# Altium PCB pcb.PCBDOC
Units mm, origin at the board's own origin, x right, y up, seen from the top; angles counter-clockwise.
Board outline 150 x 150 mm, 2 copper layers (Top Layer, Bottom Layer); 109 components, 66 nets, 410 pads, 3 vias.
Unrouted connection lines stored in the file: 233.
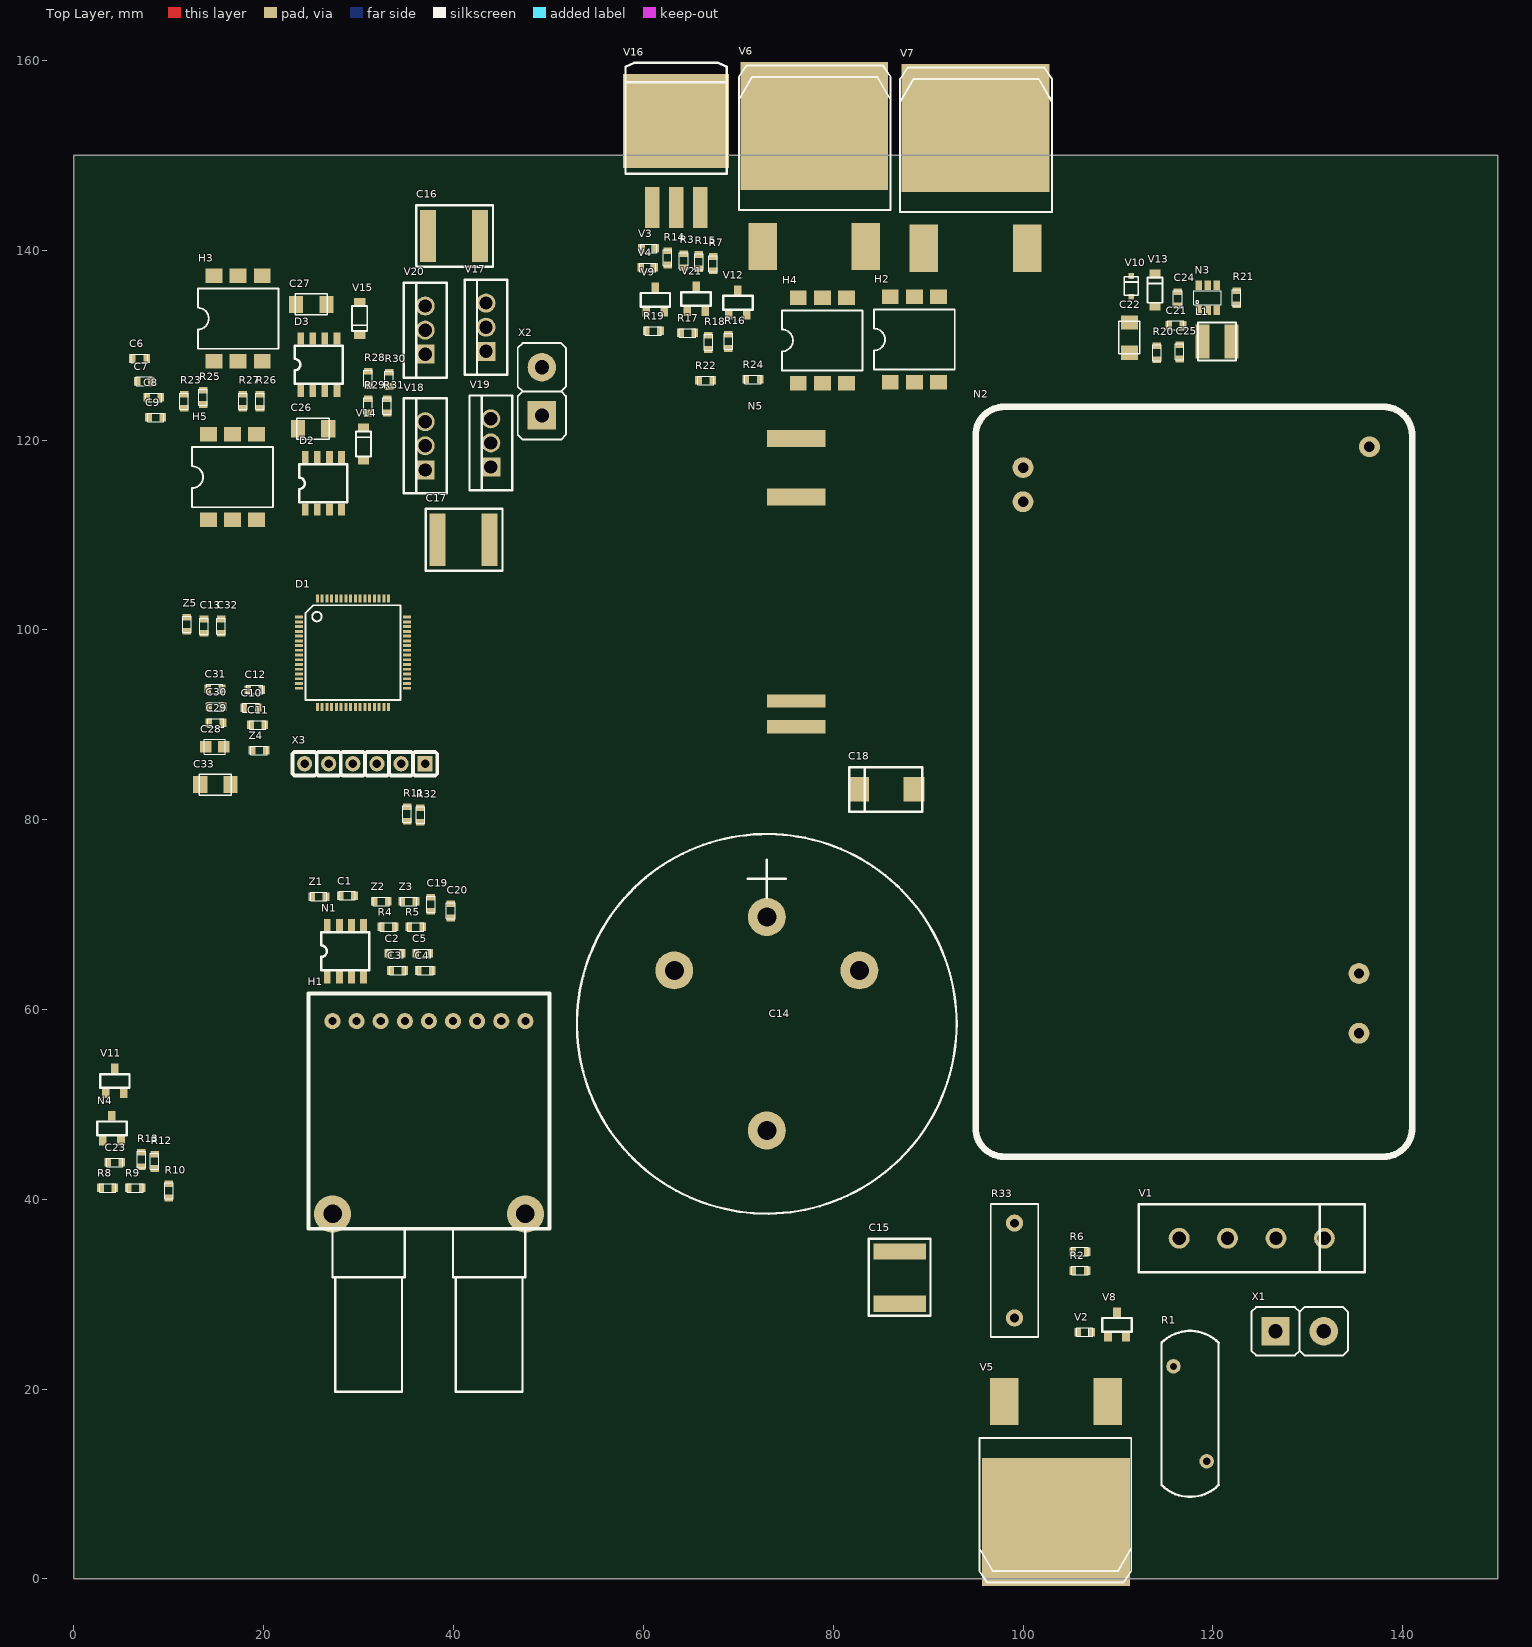
[diagram p0: Top Layer view]
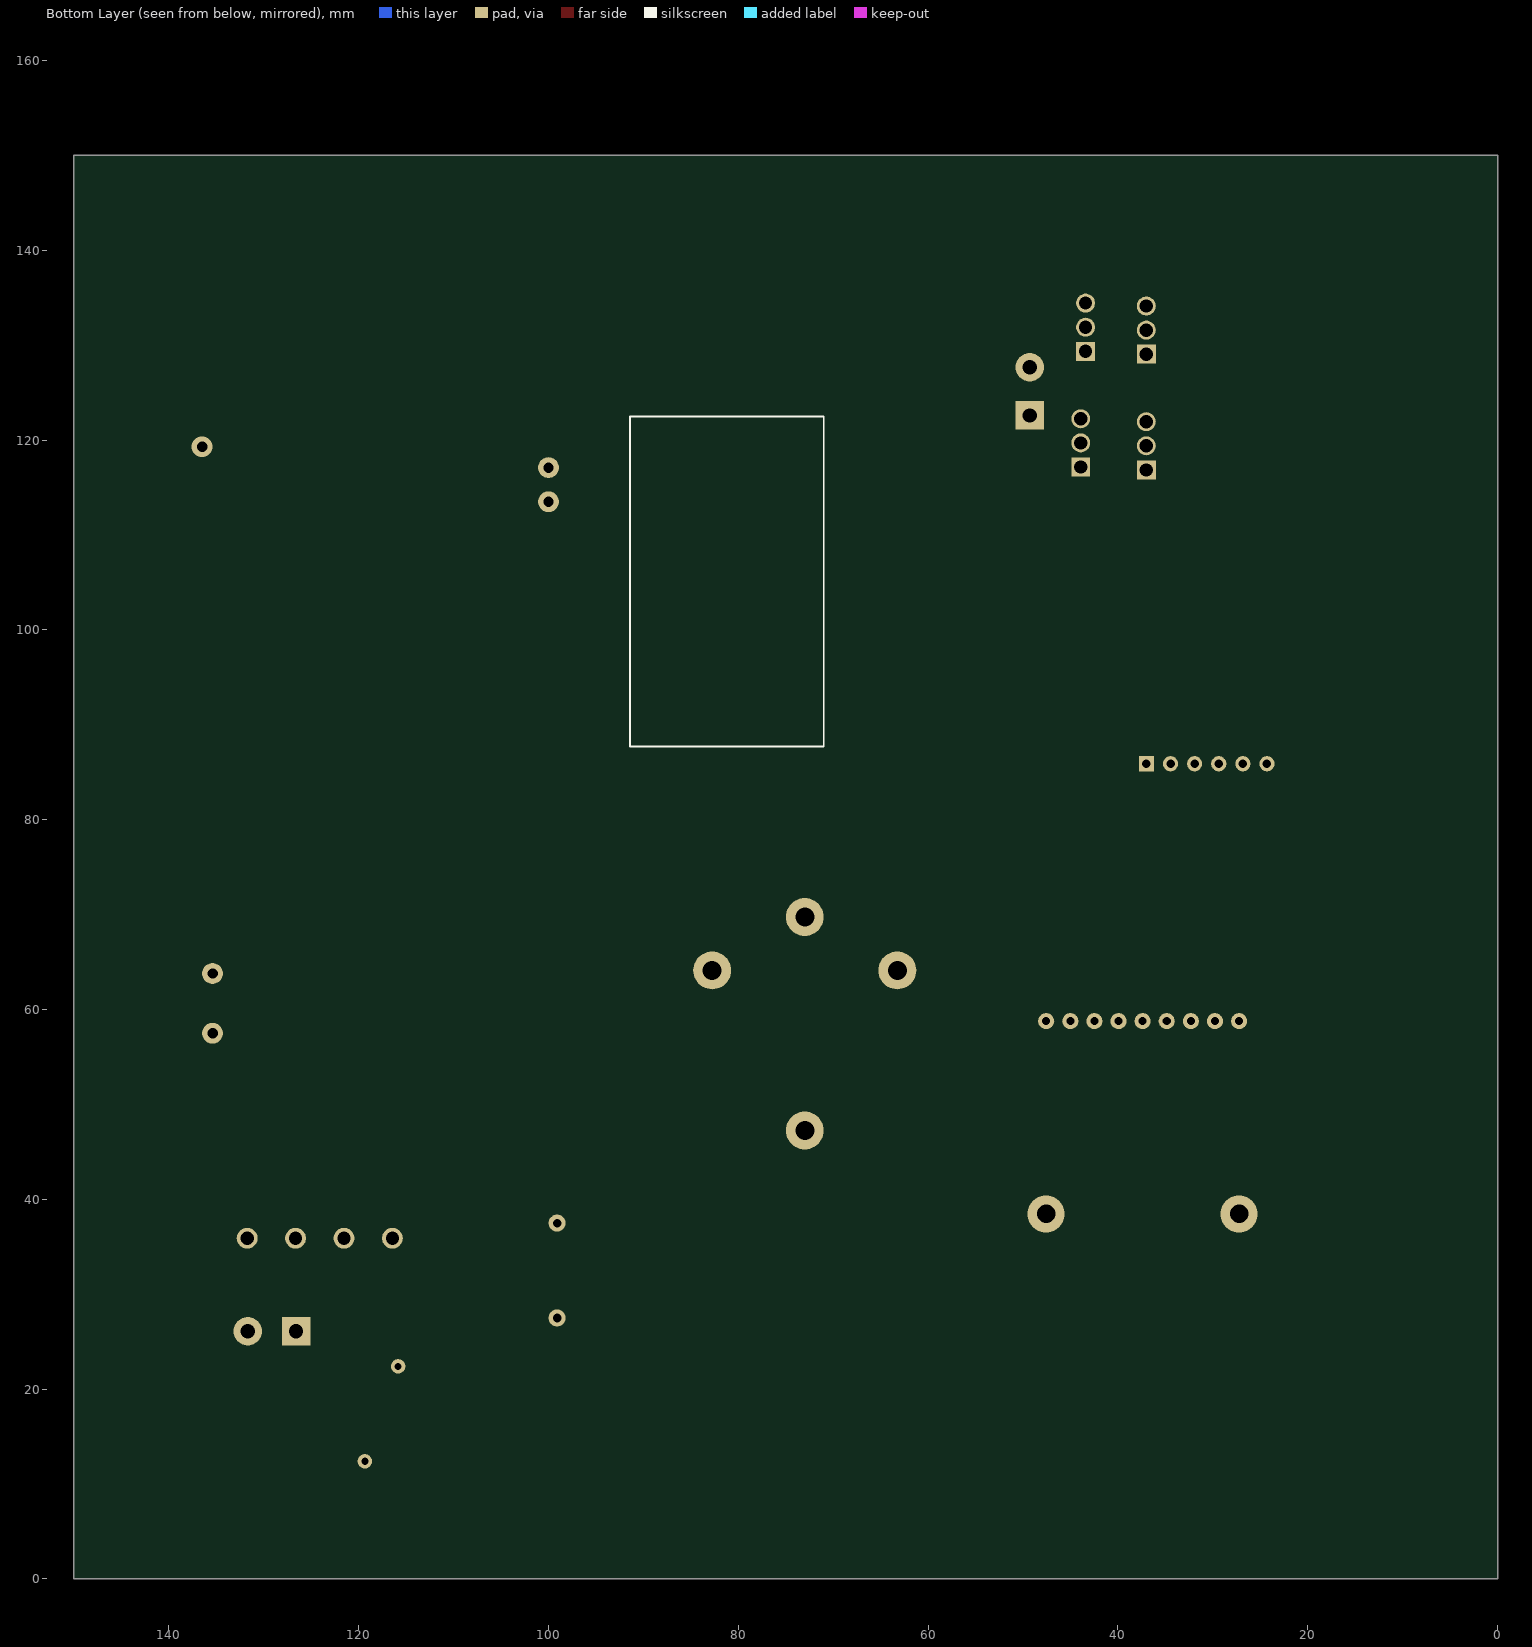
[diagram p1: Bottom Layer view, seen from below]

## Layer stack, top to bottom
Top Layer: signal copper 0.0356
Dielectric: dielectric 0.32, FR-4, Dk 4.8
Bottom Layer: signal copper 0.0356

## Board outline
0,0 150,0 150,150 0,150

## Design rules (kind name [scope] priority, off if disabled: settings)
Clearance [All] p1: gap=0.15
ComponentClearance [All] p1: gap=0.1 collisioncheckmode=2
Height [All] p1 off: minheight=0 maxheight=25.4 prefheight=12.7
PolygonConnect [All] p1: connectstyle=Relief reliefconductorwidth=0.254 reliefentries=4 polygonreliefangle="90 Angle"
RoomDefinition dclass-amp [InComponentClass('dclass-amp')] p1 off: confinementstyle=ConfineIn formatcopy=TRUE outline -188.468,-272.288 -137.668,-272.288 -137.668,-246.888 -188.468,-246.888
RoutingLayers [All] p1: top layer=Horizontal bottom layer=Vertical
RoutingVias [All] p1: holewidth=0.3 width=0.5 viastyle="Through Hole" minholewidth=0.3 minwidth=0.5 maxholewidth=0.3 maxwidth=0.5
SolderMaskExpansion [All] p1: expansion=0.102
TestPointUsage [All] p1: valid=0 allowmultiple=FALSE
Testpoint [All] p1: side=15 testpointundercomponent=TRUE minsize=1.016 maxsize=2.54 preferedsize=1.524 minholesize=0 maxholesize=1.016 preferedholesize=0.813 testpointgrid=0.025 style=1023 order=-539222988
Width [All] p1: maxlimit=1 minlimit=0.15 preferedwidth=0.15
15 further rules are at their usual default settings.

## Components (designator, comment, footprint, x,y, rotation, side; value= is the part's Value field where it differs from the comment)
C1 "C_SMD_CER_100N_50V_10%_X7R_0603" SMD_0603 28.8,72 r0 top
C2 "C_SMD_CER_100N_50V_10%_X7R_0603" SMD_0603 33.833,65.915 r0 top
C3 "C_SMD_CER_100N_50V_10%_X7R_0603" SMD_0603 34.1,64.115 r0 top
C4 "C_SMD_CER_100N_50V_10%_X7R_0603" SMD_0603 37.011,64.115 r0 top
C5 "C_SMD_CER_100N_50V_10%_X7R_0603" SMD_0603 36.744,65.915 r0 top
C6 "C_SMD_CER_100N_50V_10%_X7R_0603" SMD_0603 6.9,128.6 r0 top
C7 "C_SMD_CER_100N_50V_10%_X7R_0603" SMD_0603 7.4,126.2 r0 top
C8 "C_SMD_CER_100N_50V_10%_X7R_0603" SMD_0603 8.4,124.5 r0 top
C9 "C_SMD_CER_100N_50V_10%_X7R_0603" SMD_0603 8.6,122.4 r0 top
C10 "C_SMD_CER_100N_50V_10%_X7R_0603" SMD_0603 18.65,91.8 r180 top
C11 "C_SMD_CER_100N_50V_10%_X7R_0603" SMD_0603 19.35,90 r180 top
C12 "C_SMD_CER_100N_50V_10%_X7R_0603" SMD_0603 19.05,93.7 r180 top
C13 "C_SMD_CER_100N_50V_10%_X7R_0603" SMD_0603 13.7,100.4 r90 top
C14 "C_THT_ALU_1000U_400V_20%_T2GP102FA" THT_CAP_T2GP102FA 73,58.5 r90 top
C15 "C_SMD_CER_1U_500V_20%_X7R_2220" SMD_2220 87,31.7 r90 top
C16 "C_SMD_CER_1U_500V_20%_X7R_2220" SMD_2220 40,141.5 r0 top
C17 "C_SMD_CER_1U_500V_20%_X7R_2220" SMD_2220 41,109.5 r0 top
C18 "C_SMD_TAN_100U_16V_20%_7343" SMD_7343P 88.5,83.2 r180 top
C19 "C_SMD_CER_1U_16V_10%_X5R_0603" SMD_0603 37.6,71.1 r90 top
C20 "C_SMD_CER_1U_16V_10%_X5R_0603" SMD_0603 39.7,70.4 r90 top
C21 "C_SMD_CER_220N_25V_10%_X5R_0603" SMD_0603 116.1,132.1 r180 top
C22 "C_SMD_CER_33U_6V3_20%_X5R_1206" SMD_1206 111.2,129.1 r90 top
C23 "C_SMD_CER_2U2_25V_10%_X5R_0603" SMD_0603 4.3,43.9 r180 top
C24 "C_SMD_CER_2U2_25V_10%_X5R_0603" SMD_0603 116.3,134.9 r90 top
C25 "C_SMD_CER_10P_50V_5%_NP0_0603" SMD_0603 116.5,129.3 r90 top
C26 "C_SMD_CER_10U_35V_10%_X5R_1206" SMD_1206 26.9,121.2 r180 top
C27 "C_SMD_CER_10U_35V_10%_X5R_1206" SMD_1206 26.7,134.3 r180 top
C28 "C_SMD_CER_10U_16V_10%_X5R_0805" SMD_0805 15.8,87.7 r180 top
C29 "C_SMD_CER_10N_50V_10%_X7R_0603" SMD_0603 14.95,90.2 r180 top
C30 "C_SMD_CER_10N_50V_10%_X7R_0603" SMD_0603 14.95,91.9 r180 top
C31 "C_SMD_CER_10N_50V_10%_X7R_0603" SMD_0603 14.85,93.8 r180 top
C32 "C_SMD_CER_10N_50V_10%_X7R_0603" SMD_0603 15.5,100.4 r90 top
C33 "C_SMD_CER_22U_6V3_20%_X5R_1206" SMD_1206 16.6,83.7 r180 top
D1 "D_DSPIC33FJ64GS606_TQFP-64" SMD_TQFP-64 29.4,97.6 r0 top
D2 "D_IRS2104SPBF_SOP-8" SMD_SOP_8 24.377,118.186 r0 top
D3 "D_IRS2104SPBF_SOP-8" SMD_SOP_8 23.9,130.7 r0 top
H1 "H_OPTO_TRANSCEIVER_ST_3V3_100MBPS_1300NM" THT_AFBR-5803TZ 37.4,61.7 r180 top
H2 "H_OPTOISOLATOR_7500V_5MHZ_SMD-6" SMD-6 88.55,130.6 r0 top
H3 "H_OPTOISOLATOR_7500V_5MHZ_SMD-6" SMD-6 17.3,132.8 r0 top
H4 "H_OPTOISOLATOR_7500V_5MHZ_SMD-6" SMD-6 78.85,130.5 r0 top
H5 "H_OPTOISOLATOR_7500V_5MHZ_SMD-6" SMD-6 16.7,116.1 r0 top
L1 "L_SMD_47U_0A55_20%" SMD_INDUCT-74404041470 118.9,130.4 r0 top
N1 "N_LT1711_SOP-8" SMD_SOP_8 26.7,68.9 r0 top
N2 "N_SMPS_265AC-to-12V_24W" THT_VCP24US12-E 141,123.5 r270 top
N3 "LT1934" SMD_SOT_23_6 118.5,133.7 r0 top
N4 "N_TLVH431_SOT23-3" SMD_SOT_23_3 4,47.5 r0 top
N5 "N_SMPS_12V_3W" THT_SPAC265BC12P0.30 71,122.5 r270 top
R1 "R_THT_NTC_120E_20%" THT_R_A_L17.5_D6_P10 117.6,22.4 r270 top
R2 "R_SMD_THINFILM_51K_0W1_1%_50PPM_0603" SMD_0603 106,32.5 r0 top
R3 "R_SMD_THINFILM_51K_0W1_1%_50PPM_0603" SMD_0603 64.25,138.9 r90 top
R4 "R_SMD_THINFILM_510E_0W1_0.1%_25PPM_0603" SMD_0603 33.099,68.704 r0 top
R5 "R_SMD_THINFILM_510E_0W1_0.1%_25PPM_0603" SMD_0603 36.01,68.704 r0 top
R6 "R_SMD_THINFILM_2M2_0W1_1%_50PPM_0603" SMD_0603 106,34.5 r0 top
R7 "R_SMD_THINFILM_2M2_0W1_1%_50PPM_0603" SMD_0603 67.35,138.6 r90 top
R8 "R_SMD_THINFILM_10K_0W1_1%_50PPM_0603" SMD_0603 3.544,41.204 r0 top
R9 "R_SMD_THINFILM_10K_0W1_1%_50PPM_0603" SMD_0603 6.455,41.204 r0 top
R10 "R_SMD_THINFILM_10K_0W1_1%_50PPM_0603" SMD_0603 10,40.9 r90 top
R11 "R_SMD_THINFILM_10K_0W1_1%_50PPM_0603" SMD_0603 35.1,80.6 r90 top
R12 "R_SMD_THINFILM_820K_0W1_1%_100PPM_0603" SMD_0603 8.5,44 r90 top
R13 "R_SMD_THINFILM_100K_0W1_1%_50PPM_0603" SMD_0603 7.1,44.2 r90 top
R14 "R_SMD_THINFILM_100K_0W1_1%_50PPM_0603" SMD_0603 62.55,139.2 r90 top
R15 "R_SMD_THINFILM_100K_0W1_1%_50PPM_0603" SMD_0603 65.85,138.8 r90 top
R16 "R_SMD_THINFILM_100K_0W1_1%_50PPM_0603" SMD_0603 68.95,130.4 r90 top
R17 "R_SMD_THINFILM_100K_0W1_1%_50PPM_0603" SMD_0603 64.65,131.3 r180 top
R18 "R_SMD_THINFILM_100K_0W1_1%_50PPM_0603" SMD_0603 66.85,130.3 r90 top
R19 "R_SMD_THINFILM_100K_0W1_1%_50PPM_0603" SMD_0603 61.05,131.5 r0 top
R20 "R_SMD_THINFILM_620K_0W1_1%_50PPM_0603" SMD_0603 114.1,129.2 r90 top
R21 "R_SMD_THINFILM_1M_0W1_1%_50PPM_0603" SMD_0603 122.5,135 r90 top
R22 "R_SMD_THINFILM_100E_0W1_1%_50PPM_0603" SMD_0603 66.55,126.3 r180 top
R23 "R_SMD_THINFILM_100E_0W1_1%_50PPM_0603" SMD_0603 11.6,124.1 r90 top
R24 "R_SMD_THINFILM_100E_0W1_1%_50PPM_0603" SMD_0603 71.55,126.4 r180 top
R25 "R_SMD_THINFILM_100E_0W1_1%_50PPM_0603" SMD_0603 13.6,124.5 r90 top
R26 "R_SMD_THINFILM_1K_0W1_1%_50PPM_0603" SMD_0603 19.6,124.1 r90 top
R27 "R_SMD_THINFILM_1K_0W1_1%_50PPM_0603" SMD_0603 17.8,124.1 r90 top
R28 "R_SMD_THINFILM_10E_0W1_1%_50PPM_0603" SMD_0603 31,126.5 r90 top
R29 "R_SMD_THINFILM_10E_0W1_1%_50PPM_0603" SMD_0603 31,123.6 r90 top
R30 "R_SMD_THINFILM_10E_0W1_1%_50PPM_0603" SMD_0603 33.2,126.4 r90 top
R31 "R_SMD_THINFILM_10E_0W1_1%_50PPM_0603" SMD_0603 33,123.6 r90 top
R32 "R_SMD_THINFILM_470E_0W1_1%_50PPM_0603" SMD_0603 36.5,80.5 r90 top
R33 "R_THT_METALOXIDEFILM_120K_1W_5%_200PPM" THT_R_A_L14.0_W5.0_P10.0 99.1,27.5 r90 top
V1 "V_THT_BRIDGE_RECTIFIER_KBU6J_600V_6A_KBU" THT_KBU6J 136,39.5 r180 top
V2 "V_SMD_Z-DIODE_CZRU52C6V2_6V2_0W15_5%_0603" SMD_0603P 106.5,26 r0 top
V3 "V_SMD_Z-DIODE_CZRU52C6V2_6V2_0W15_5%_0603" SMD_0603P 60.55,140.2 r0 top
V4 "V_SMD_Z-DIODE_CZRU52C6V2_6V2_0W15_5%_0603" SMD_0603P 60.45,138.2 r0 top
V5 "V_SMD_FET_IXTT16P60P_PMOS_600V_16A_92NC_460W_TO-268-3" SMD_TO-268-3 108.9,18.7 r180 top
V6 "V_SMD_FET_IXTT16P60P_PMOS_600V_16A_92NC_460W_TO-268-3" SMD_TO-268-3 72.55,140.4 r0 top
V7 "V_SMD_FET_IXTT16P60P_PMOS_600V_16A_92NC_460W_TO-268-3" SMD_TO-268-3 89.55,140.2 r0 top
V8 "V_SMD_FET_NMOS_BSS127S-7_600V_0A05_1NC08_0W61_SOT-23-3" SMD_SOT_23_3 109.9,26.8 r0 top
V9 "V_SMD_FET_NMOS_BSS127S-7_600V_0A05_1NC08_0W61_SOT-23-3" SMD_SOT_23_3 61.25,134.8 r0 top
V10 "V_SMD_SCHOTTKY_MBR0540T1G_40V_0A5_SOD-123" SMD_SOD_323 111.4,135.1 r90 top
V11 "V_SMD_FET_PMOS_SSM3J327R_20V_6A_4NC6_1W_SOT-23-3" SMD_SOT_23_3 4.3,52.5 r0 top
V12 "V_SMD_FET_PMOS_SSM3J327R_20V_6A_4NC6_1W_SOT-23-3" SMD_SOT_23_3 69.95,134.5 r0 top
V13 "V_SMD_SCHOTTKY_MBR0540T1G_40V_0A5_SOD-123" SMD_SOD_123 113.9,134.1 r90 top
V14 "V_SMD_SCHOTTKY_MBR0540T1G_40V_0A5_SOD-123" SMD_SOD_123 30.5,117.9 r90 top
V15 "V_SMD_SCHOTTKY_MBR0540T1G_40V_0A5_SOD-123" SMD_SOD_123 30.1,134.5 r270 top
V16 "V_SMD_DIODE_RFUS20NS4STL_430V_20A_TO-263-3" SMD_TO_263 63.45,144.5 r0 top
V17 "V_THT_FET_NMOS_AOT11N60L_600V_11A_37NC_TO-220" THT_TO_220 43.412,129.356 r90 top
V18 "V_THT_FET_NMOS_AOT11N60L_600V_11A_37NC_TO-220" THT_TO_220 37.012,116.856 r90 top
V19 "V_THT_FET_NMOS_AOT11N60L_600V_11A_37NC_TO-220" THT_TO_220 43.92,117.164 r90 top
V20 "V_THT_FET_NMOS_AOT11N60L_600V_11A_37NC_TO-220" THT_TO_220 37.012,129.048 r90 top
V21 "V_SMD_FET_NMOS_FDN357N_30V_1A9_4NC2_0W5_SOT-23-3" SMD_SOT_23_3 65.55,134.9 r0 top
X1 "X_CONNECTOR_P5.08_D1.5_1X2" THT_CON_P5.08_D1.5_1X2 126.6,26.1 r0 top
X2 "X_CONNECTOR_P5.08_D1.5_1X2" THT_CON_P5.08_D1.5_1X2 49.3,122.6 r90 top
X3 "X_CONNECTOR_P2.54_D0.9_1X6" THT_CON_P2.54_D0.9_1X6 37,85.9 r180 top
Z1 "Z_SMD_FERRITE_1A5_470E@100MHZ_0603" SMD_0603 25.8,71.9 r0 top
Z2 "Z_SMD_FERRITE_1A5_470E@100MHZ_0603" SMD_0603 32.376,71.404 r0 top
Z3 "Z_SMD_FERRITE_1A5_470E@100MHZ_0603" SMD_0603 35.288,71.404 r0 top
Z4 "Z_SMD_FERRITE_1A5_470E@100MHZ_0603" SMD_0603 19.5,87.3 r0 top
Z5 "Z_SMD_FERRITE_1A5_470E@100MHZ_0603" SMD_0603 11.9,100.6 r90 top

## Footprints (in the part's own frame and the unit in brackets; to place one, negate y for a bottom-side part, rotate by r counter-clockwise, add the part's x,y. Pads: shape width x height; smd on the part's side, far side on the other; paste and mask are expansions set on the pad)
SMD-6 [mm]
  rect 1.78x1.52 smd: 1(-2.54,-4.507) 2(0,-4.507) 3(2.54,-4.507) 4(2.54,4.507) 5(0,4.507) 6(-2.54,4.507)
  silkscreen extent -4.25,-3.17 4.25,3.17
SMD_0603 [mm] "SMD_0603"
  rect 0.7x0.9 smd: 1(-0.75,0) 2(0.75,0)
  silkscreen extent -0.85,-0.45 0.85,0.45
SMD_0603P [mm] "SMD_0603P"
  rect 0.7x0.9 smd: 1(-0.75,0) 2(0.75,0)
  silkscreen extent -0.85,-0.45 0.85,0.45
SMD_0805 [mm] "SMD_0805"
  rect 1.2x1.2 smd: 1(0,0) 2(1.9,0)
  silkscreen extent -0.15,-0.8 2.05,0.8
SMD_1206 [mm] "SMD_1206"
  rect 1.5x1.8 smd: 1(0.1,0) 2(3.3,0)
  silkscreen extent 0.01,-1.1 3.41,1.1
SMD_2220 [mm] "SMD_2220"
  rect 1.7x5.5 smd: 1(-2.7,0) 2(2.8,0)
  silkscreen extent -3.95,-3.25 4.15,3.25
SMD_7343P [mm] "SMD_7343P"
  rect 2.2x2.6 smd: 1(0,0) 2(5.85,0)
  silkscreen extent -0.9,-2.35 6.8,2.35
SMD_INDUCT-74404041470 [mm]
  rect 1.5x3.6 smd: 1(0,0) 2(3.05,0)
  silkscreen extent -0.48,-2 3.52,2
SMD_SOD_123 [mm]
  rect 0.9x1.2 smd: 1(0,0) 2(3.4,0)
  silkscreen extent 0.37,-0.8 3.02,0.8
SMD_SOD_323 [mm] "SMD_SOD_323"
  rect 0.6x0.6 smd: 1(0,0) 2(2.2,0)
  silkscreen extent 0.15,-0.75 2.1,0.75
SMD_SOP_8 [mm] "SMD_SOP_8"
  rect 0.7x1.3 smd: 1(0,-5.5) 2(1.27,-5.5) 3(2.54,-5.5) 4(3.81,-5.5) 5(3.81,0) 6(2.54,0) 7(1.27,0) 8(0,0)
  silkscreen extent -0.65,-4.75 4.4,-0.75
SMD_SOT_23_3 [mm] "SMD_SOT_23_3"
  rect 0.8x1 smd: 1(-0.95,-1.3) 2(0.95,-1.3) 3(0,1.3)
  silkscreen extent -1.55,-0.75 1.55,0.7
SMD_SOT_23_6 [mm] "SMD_SOT_23_6"
  rect 0.7x1 smd: 1(0,0) 2(0.95,0) 3(1.9,0) 4(1.9,2.6) 5(0.95,2.6) 6(0,2.6)
  silkscreen extent -0.5,0.55 2.4,2.05
SMD_TO-268-3 [mm] "SMD_TO-268-3"
  rect 3x5 smd: 1(0,0) 3(10.9,0)
  rect 15.59x13.49 smd: 2(5.45,12.7)
  silkscreen extent -2.5,3.85 13.5,19.05
SMD_TO_263 [mm] "SMD_TO_263"
  rect 1.52x4.32 smd: 1(-2.54,0) 2(0,0) 3(2.54,0)
  rect 11.18x9.91 smd: 4(0,9.144)
  silkscreen extent -5.34,3.55 5.34,15.25
SMD_TQFP-64 [mm]
  rect 0.85x0.3 smd: 1(-5.7,3.75) 2(-5.7,3.25) 3(-5.7,2.75) 4(-5.7,2.25) 5(-5.7,1.75) 6(-5.7,1.25) 7(-5.7,0.75) 8(-5.7,0.25) 9(-5.7,-0.25) 10(-5.7,-0.75) 11(-5.7,-1.25) 12(-5.7,-1.75) 13(-5.7,-2.25) 14(-5.7,-2.75) 15(-5.7,-3.25) 16(-5.7,-3.75) 33(5.7,-3.75) 34(5.7,-3.25) 35(5.7,-2.75) 36(5.7,-2.25) 37(5.7,-1.75) 38(5.7,-1.25) 39(5.7,-0.75) 40(5.7,-0.25) 41(5.7,0.25) 42(5.7,0.75) 43(5.7,1.25) 44(5.7,1.75) 45(5.7,2.25) 46(5.7,2.75) 47(5.7,3.25) 48(5.7,3.75)
  rect 0.3x0.85 smd: 17(-3.75,-5.7) 18(-3.25,-5.7) 19(-2.75,-5.7) 20(-2.25,-5.7) 21(-1.75,-5.7) 22(-1.25,-5.7) 23(-0.75,-5.7) 24(-0.25,-5.7) 25(0.25,-5.7) 26(0.75,-5.7) 27(1.25,-5.7) 28(1.75,-5.7) 29(2.25,-5.7) 30(2.75,-5.7) 31(3.25,-5.7) 32(3.75,-5.7) 49(3.75,5.7) 50(3.25,5.7) 51(2.75,5.7) 52(2.25,5.7) 53(1.75,5.7) 54(1.25,5.7) 55(0.75,5.7) 56(0.25,5.7) 57(-0.25,5.7) 58(-0.75,5.7) 59(-1.25,5.7) 60(-1.75,5.7) 61(-2.25,5.7) 62(-2.75,5.7) 63(-3.25,5.7) 64(-3.75,5.7)
  silkscreen extent -5,-5 5,5
THT_AFBR-5803TZ [mm]
  round 1.7 hole 0.85: 1(-10.16,2.92) 2(-7.62,2.92) 3(-5.08,2.92) 4(-2.54,2.92) 5(0,2.92) 6(2.54,2.92) 7(5.08,2.92) 8(7.62,2.92) 9(10.16,2.92)
  silkscreen extent -12.7,0 12.7,41.99
THT_CAP_T2GP102FA [mm]
  round 4 hole 2: 1(-11.25,0) 2(11.25,0) 3(5.625,-9.75) 4(5.625,9.75)
  silkscreen extent -20,-20 20,20
THT_CON_P2.54_D0.9_1X6 [mm]
  rect 1.6x1.6 hole 0.9: 1(0,0)
  round 1.6 hole 0.9: 2(2.54,0) 3(5.08,0) 4(7.62,0) 5(10.16,0) 6(12.7,0)
  silkscreen extent -1.27,-1.25 13.97,1.25
THT_CON_P5.08_D1.5_1X2 [mm]
  rect 3x3 hole 1.5: 1(0,0)
  round 3 hole 1.5: 2(5.08,0)
  silkscreen extent -2.54,-2.54 7.62,2.54
THT_KBU6J [mm]
  round 2.2 hole 1.4: 1(4.25,3.6) 2(9.35,3.6) 3(14.45,3.6) 4(19.55,3.6)
  silkscreen extent 0,0 23.8,7.2
THT_R_A_L14.0_W5.0_P10.0 [mm]
  round 1.8 hole 0.9: 1(0,0) 2(10,0)
  silkscreen extent -2,-2.5 12,2.5
THT_R_A_L17.5_D6_P10 [mil]
  round 60 hole 30: 1(0,-68.9) 2(393.7,68.9)
  silkscreen extent -147,-118 541,118
THT_SPAC265BC12P0.30 [mm]
  rect 1.8x6.2 smd: 1(2.35,5.1) 2(8.5,5.1)
  rect 1.4x6.2 smd: 3(30,5.1) 4(32.7,5.1)
  round 1.2 on Keep-Out: 5(0.925,5.1) 5(1.175,5.1) 5(1.425,5.1) 5(1.675,5.1) 5(1.925,5.1) 5(2.175,5.1) 5(2.425,5.1) 5(2.675,5.1) 5(2.925,5.1) 5(3.175,5.1) 5(3.425,5.1) 5(3.675,5.1) 5(3.925,5.1) 5(4.175,5.1) 5(4.425,5.1) 5(4.675,5.1) 5(4.925,5.1) 5(5.175,5.1) 5(5.425,5.1) 5(5.675,5.1) 5(5.925,5.1) 5(6.175,5.1) 5(6.425,5.1) 5(6.675,5.1) 5(6.925,5.1) 5(7.175,5.1) 5(7.425,5.1) 5(7.675,5.1) 5(7.925,5.1) 5(8.175,5.1) 5(8.425,5.1) 5(8.675,5.1) 5(8.925,5.1) 5(9.175,5.1) 5(9.425,5.1) 5(9.675,5.1) 5(9.925,5.1) 5(28.85,5.1) 5(29.1,5.1) 5(29.35,5.1) 5(29.6,5.1) 5(29.85,5.1) 5(30.1,5.1) 5(30.35,5.1) 5(30.6,5.1) 5(30.85,5.1) 5(31.1,5.1) 5(31.35,5.1) 5(31.6,5.1) 5(31.85,5.1) 5(32.1,5.1) 5(32.35,5.1) 5(32.6,5.1) 5(32.85,5.1) 5(33.1,5.1) 5(33.35,5.1) 5(33.6,5.1) 5(33.85,5.1)
THT_TO_220 [mm] "THT_TO_220"
  rect 2x2 hole 1.4: 1(0,0)
  round 2 hole 1.4: 2(2.54,0) 3(5.08,0)
  silkscreen extent -2.46,-2.25 7.54,2.25
THT_VCP24US12-E [mm] "SMPS Footprint (VCP24US12-E)"
  round 2.2 hole 1.1: 1(66,-5.6) 2(59.7,-5.6) 3(10,-41) 4(6.4,-41)
  silkscreen extent 0,-46 79,0

## Part data
C1 C2 C3 C4 C5 C6 C7 C8 C9 C10 C11 C12 C13 C19 C20 C21 C23 C24 C25 C28 C29 C30 C31 C32 C33: "SMD Capacitor"
C14: "THT Aluminum capacitor"
C18: "SMD Tantal Capacitor"
C26 C27: "SMD Capacitor, 10uF, 35V, 1206"
D2 D3: "Half-Bridge Driver, 600V"
L1: "SMD Inductor"
N1: "Rail-to-rail Voltage Comparator"
N3: library part N_LT1934_SOT-23-6, "Micropower Step-Down Switching Regulators"
N4: "LOW-VOLTAGE ADJUSTABLE PRECISION SHUNT REGULATORS"
R1: "CURRENT LIMITER INRUSH 120OHM 20%"
R2 R3 R4 R5 R6 R7 R8 R9 R10 R11 R12 R13 R14 R15 R16 R17 R18 R19 R20 R21 R22 R23 R24 R25 R28 R29 R30 R31 R32: "SMD Resistor"
R26 R27: library part R_SMD_THINFILM_1K2_0W1_1%_50PPM_0603, "SMD Resistor"
V1: "Bridge Recitifer"
V2 V3 V4: "Zener Diode, 6.2V"
V5 V6 V7: library part V_SMD_FET_PMOS_600V_16A_92NC_460W_TO-268-3, "P-Channel Power MOSFET"
V8 V9 V21: "N-Channel Logic Level Enhancement Mode Field Effect Transistor"
V10: library part V_SMD_SCHOTTKY_CMDSH-3_30V_0A1_SOD-323_1, "Schottky diode, 30V, 100mA, SOD-323"
V13 V14 V15: "Schottky diode, 40V, 500mA, SOD-123"
V16: "Super Fast Recovery Diode"
V17 V18 V19 V20: "600V, 11A N-Channel MOSFET"
X1 X2: "Pitch 5.08, Diameter 1.5mm, 1 row, 2 columns"
X3: "Pitch 2.54, Diameter 0.9mm, 1 row, 6 columns"
Z1 Z2 Z3 Z4 Z5: "FERRITE CHIP 470 OHM 1500MA 0603"

## Via types
v1: diameter 3.9, hole 1.95, Top Layer to Bottom Layer, 2 vias
v2: diameter 2.2, hole 1.1, Top Layer to Bottom Layer, 1 vias

## Nets (pads, with @x,y where several pads share a name; then routed paths per layer and width w, separated by ;. In a path a pad name is that pad's centre, name@x,y a point inside that pad or via, vN(x,y) a via of type N, cw(c..) or ccw(c..) an arc to the next point about the centre after c; other vN are vias at no path point)
+3.3V: C2.1 C3.2 C19.2 C20.2 C22.2 C25.1 L1.2 R4.2 R11.2 R20.1 V10.1 X3.2 Z1.2 Z2.2 Z3.2 Z4.1 Z5.1
+12V: C6.2 C7.2 C8.2 C9.2 C18.2 D2.1 D3.1 H2.6 H3.6 H4.6 H5.6 N2.3 R8.2 R12.2 R14.2 R16.1 R26.2 R27.2 V3.2 V6.3 V11.2 V12.2 V14.1 V15.1
+325V: C14.2 C15.2 R1.2 R3.2 R33.2 V4.2 V5.2 V7.3
/MCLR: R11.1 R32.2 X3.1
FBR_RD: D1.31 H1.2
FBR_SD: D1.35 H1.4
FBR_TD: D1.32 N1.2
GND: C1.1 C2.2 C3.1 C4.1 C5.2 C10.1 C11.1 C12.1 C13.1 C19.1 C20.1 C22.1 C24.1 C28.1 C29.1 C30.1 C31.1 C32.1 C33.1 D1.9 D1.20 D1.25 D1.41 H1.1 H1.9 H2.2 H3.2 H4.2 H5.2 N1.4 N1.5 N1.6 N3.2 N5.4 R5.1 R21.2 V13.1 X3.3
HBRDG_H: D1.54 R23.1
HBRDG_L: D1.55 R25.1
NetC1_2: C1.2 N1.1 Z1.1
NetC4_2: C4.2 H1.6 Z3.1
NetC5_1: C5.1 H1.5 Z2.1
NetC10_2: C10.2 C11.2 C12.2 C28.2 C29.2 C30.2 C31.2 D1.10 D1.26 D1.38 D1.57 Z4.2
NetC13_2: C13.2 C32.2 D1.19 Z5.2
NetC21_1: C21.1 L1.1 N3.6 V13.2
NetC21_2: C21.2 N3.1 V10.2
NetC23_2: C23.2 N4.1 R12.1 R13.2
NetC24_2: C24.2 N3.4 N3.5 N5.3
NetC25_2: C25.2 N3.3 R20.2 R21.1
NetC26_1: C26.1 D2.8 V14.2
NetC26_2: C26.2 D2.6 V17.3 V18.2 X2.1
NetC27_1: C27.1 D3.8 V15.2
NetC27_2: C27.2 D3.6 V19.3 V20.2 X2.2
NetC33_2: C33.2 D1.56
NetD1_7: D1.7 R32.1
NetD2_2: D2.2 H3.4 R26.1
NetD2_5: D2.5 R29.1
NetD2_7: D2.7 R28.1
NetD3_2: D3.2 H5.4 R27.1
NetD3_5: D3.5 R31.1
NetD3_7: D3.7 R30.1
NetH1_7: H1.7 N1.8
NetH1_8: H1.8 N1.7
NetH2_1: H2.1 R22.1
NetH2_4: H2.4 R15.2
NetH3_1: H3.1 R23.2
NetH4_1: H4.1 R24.1
NetH4_4: H4.4 R18.2
NetH5_1: H5.1 R25.2
NetN1_3: N1.3 R4.1 R5.2
NetN2_1: N2.1 N5.1 V1.2 X1.1
NetN2_2: N2.2 N5.2 V1.3 X1.2
NetR1_1: R1.1 R2.2 V1.1 V2.2 V5.3
NetR2_1: R2.1 R6.2 V2.1 V5.1
NetR3_1: R3.1 R7.1 V4.1 V7.1
NetR6_1: R6.1 V8.3
NetR7_2: R7.2 V9.3
NetR8_1: R8.1 R9.2 V11.1
NetR14_1: R14.1 R15.1 V3.1 V6.1
NetR16_2: R16.2 R18.1 V12.1
NetR17_1: R17.1 R19.1 V9.1 V21.3
NetR17_2: R17.2 V12.3
NetR28_2: R28.2 V17.1
NetR29_2: R29.2 V18.1
NetR30_2: R30.2 V19.1
NetR31_2: R31.2 V20.1
NetV6_2: V6.2 V16.1 V16.3
OUT_12V: D1.59 R22.2
OUT_325V: D1.58 R24.2
PB: N4.2 R9.1 V21.1
PG: D2.3 D3.3 R10.2 V8.1 V11.3
PGEC: D1.17 X3.5
PGED: D1.18 X3.4
PGND: C6.1 C7.1 C8.1 C9.1 C14.1 C15.1 C16.1 C17.1 C18.1 C23.1 D2.4 D3.4 H2.5 H3.5 H4.5 H5.5 N2.4 N4.3 R10.1 R13.1 R19.2 R33.1 V1.4 V8.2 V9.2 V18.3 V20.3 V21.2
VHBRDG: C16.2 C17.2 V7.2 V16.4 V17.2 V19.2
pads on no net: C14.3 C14.4 D1.1 D1.2 D1.3 D1.4 D1.5 D1.6 D1.8 D1.11 D1.12 D1.13 D1.14 D1.15 D1.16 D1.21 D1.22 D1.23 D1.24 D1.27 D1.28 D1.29 D1.30 D1.33 D1.34 D1.36 D1.37 D1.39 D1.40 D1.42 D1.43 D1.44 D1.45 D1.46 D1.47 D1.48 D1.49 D1.50 D1.51 D1.52 D1.53 D1.60 D1.61 D1.62 D1.63 D1.64 H1.3 H2.3 H3.3 H4.3 H5.3 N5.5 V16.2 X3.6
copper on no net:
  other v1: 27.24,38.46 47.56,38.46
  other v2: 136.5,119.3